# EAGLE board RasPiTimePowerSW_basic (EAGLE 7.7.0)
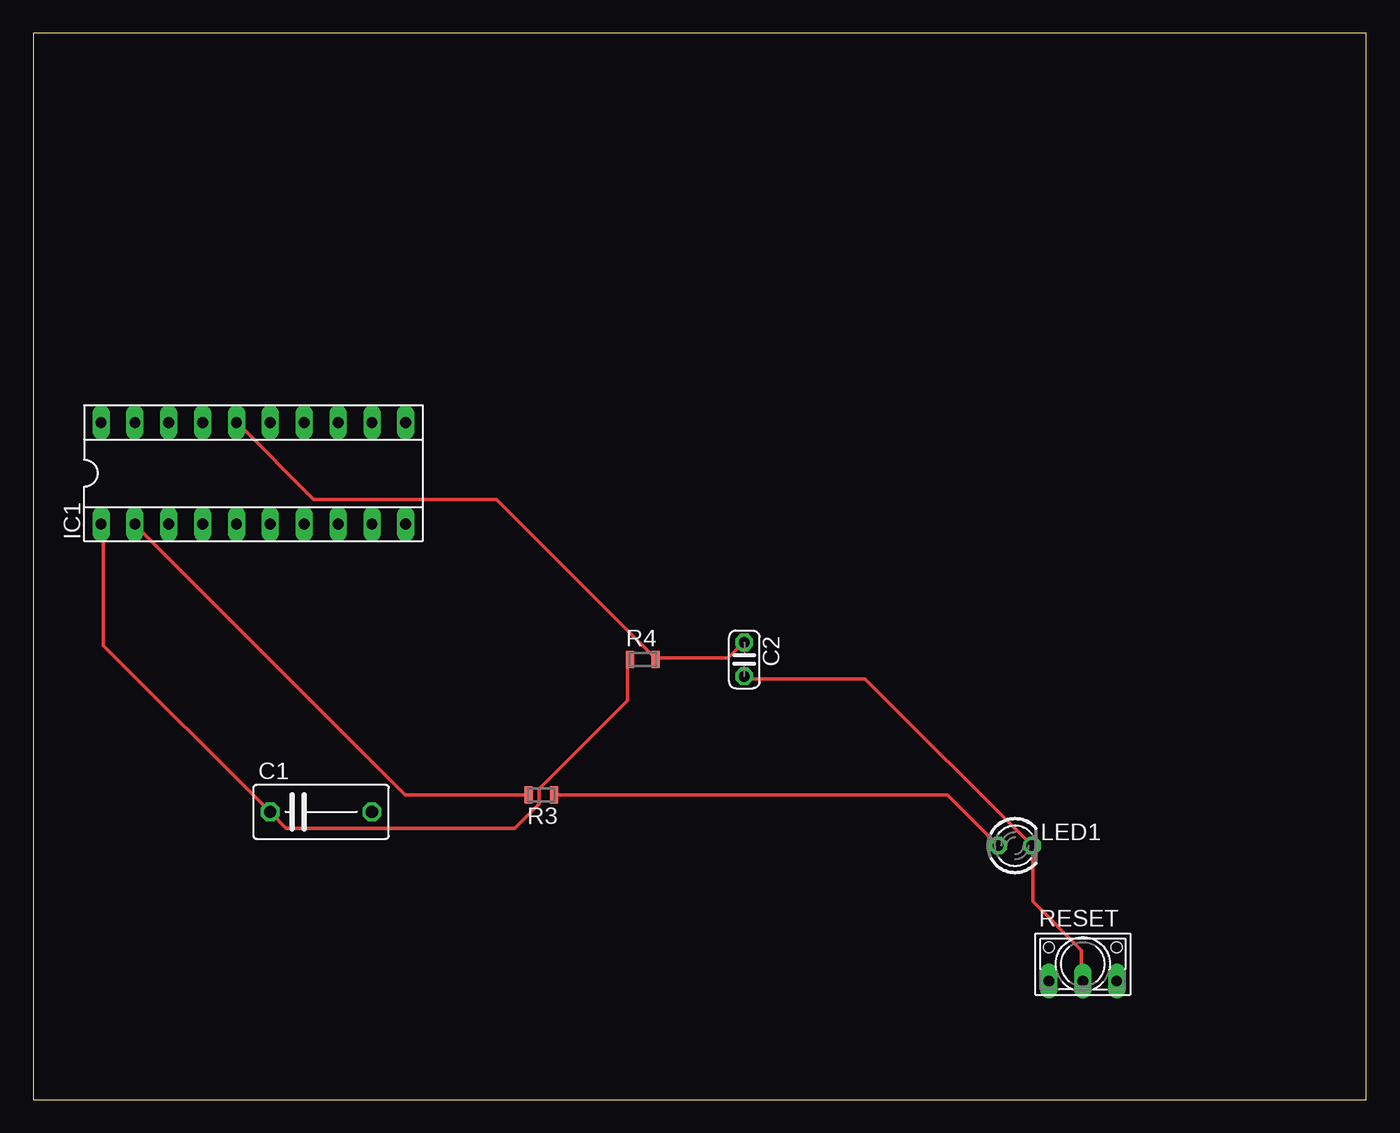
[diagram p0: board, top side]
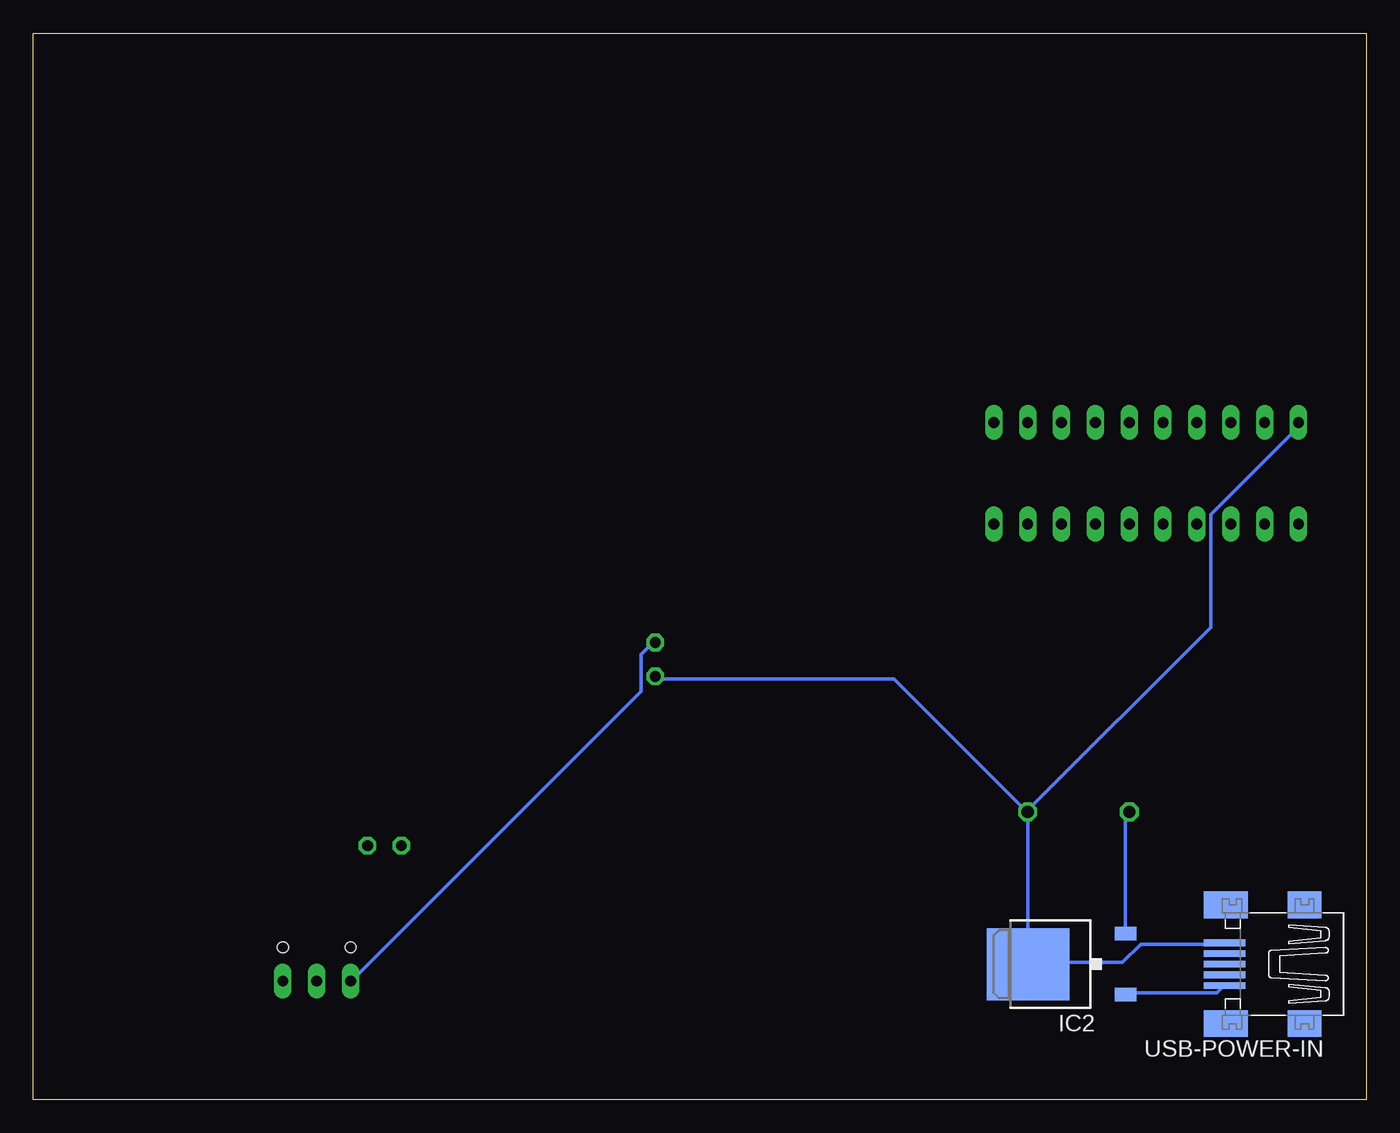
[diagram p1: board, bottom side, seen from below]

Size 100 x 80 mm. Coordinates in mm from the lower left corner, seen from the top.
Outline: 0,0 100,0 100,80 0,80 0,0
Copper layers (1*16): Top 0.035mm / dielectric 1.5mm / Bottom 0.035mm
Design rules "default": minimum track width 10mil, minimum drill 24mil, track to track 8mil, track to pad 8mil, pad to pad 8mil, via to via 8mil, smd to smd 8mil, copper to edge 40mil, drill to drill 8mil, minimum pad ring 10mil, minimum via ring 8mil, stop-mask expansion 4mil, vias tented up to drill 0mil, thermal gap 10mil

## Footprints (pad centres in the part's own frame; a part is rotated, then mirrored left to right if it is on the bottom)
C075-042X103 = drill 0.914 octagon: 1 -3.81,0; 2 3.81,0
C025-024X044 = drill 0.813 octagon: 1 -1.27,0; 2 1.27,0
SOCKET-20 = drill 0.813 long: 1 -11.43,-3.81; 2 -8.89,-3.81; 3 -6.35,-3.81; 4 -3.81,-3.81; 5 -1.27,-3.81; 6 1.27,-3.81; 7 3.81,-3.81; 8 6.35,-3.81; 9 8.89,-3.81; 10 11.43,-3.81; 11 11.43,3.81; 12 8.89,3.81; 13 6.35,3.81; 14 3.81,3.81; 15 1.27,3.81; 16 -1.27,3.81; 17 -3.81,3.81; 18 -6.35,3.81; 19 -8.89,3.81; 20 -11.43,3.81
TO252 = smd 1 x 1.6: 1 -2.28,-4.8; 2 2.28,-4.8 | smd 5.4 x 6.2: 3 0,2.5
LED3MM = drill 0.813 octagon: A -1.27,0; K 1.27,0
MINI_MELF-0102W = smd 0.6 x 1.3: 1 -0.95,0; 2 0.95,0
9450-1 = drill 0.813 long: 1 -2.54,-1.27; 2 0,-1.27; 3 2.54,-1.27 | hole 0.813: 2.54,1.27; -2.54,1.27
32005-400 = smd 3.1 x 0.5: 1 3,1.6; 2 3,0.8; 3 3,0; 4 3,-0.8; 5 3,-1.6 | smd 2.5 x 2: M1 -3,-4.45; M2 -3,4.45 | smd 3.3 x 2: M3 2.9,4.45; M4 2.9,-4.45

## Placement (x,y rotation side)
C1  20μF 16V  [C075-042X103]  21.59,21.59 0 top
C2  1nF(102)  [C025-024X044]  53.34,33.02 270 top
IC1  MSP430G2553  [SOCKET-20]  16.51,46.99 0 top
IC2  NJM2391  [TO252]  22.86,10.16 90 bottom
LED1  TLLG4400  [LED3MM]  73.66,19.05 0 top
R3  [MINI_MELF-0102W]  38.1,22.86 180 top
R4  47kΩ  [MINI_MELF-0102W]  45.72,33.02 0 top
RESET  9450-1  [9450-1]  78.74,10.16 0 top
USB-POWER-IN  USB Micro  [32005-400]  7.62,10.16 180 bottom

## Library data of the parts
C1 C2 R4 = resistor
IC1 = ic-package
IC2 = linear
LED1 = led; MF: VISHAY SEMICONDUCTOR; OC_FARNELL: 1612435
R3 = resistor; R: 200Ω
RESET = switch-misc
USB-POWER-IN = con-cypressindustries; OC_FARNELL: unknown; OC_NEWARK: unknown

## Nets
3.3V: C1.1 IC1.1 IC2.2 R4.1
5VIN: IC2.1 USB-POWER-IN.1
GND: C1.2 C2.2 IC1.20 IC2.3 LED1.K RESET.2 USB-POWER-IN.5
N$2: IC1.13
N$4: IC1.2 R3.2
N$7: LED1.A R3.1
RESET: C2.1 IC1.16 R4.2 RESET.1

## Tracks (layer width: path | path; a pad name or v marks a point on that pad's centre or on a via)
3.3V
  Top 0.254: R4.1 44.58,32.92 44.58,29.95 37.95,23.32 37.95,22.17 36.12,20.34 18.97,20.34 17.83,21.49 C1.1 17.6,21.72 5.26,34.06 5.26,42.98 IC1.1
  Bottom 0.254: IC2.2 18.06,12.57 18.06,21.26 17.83,21.49 C1.1
5VIN
  Bottom 0.254: IC2.1 18.06,8 11.2,8 10.74,8.46 USB-POWER-IN.1
GND
  Top 0.254: RESET.2 78.64,8.91 78.64,11.2 74.98,14.86 74.98,18.97 LED1.K 74.75,19.2 62.41,31.55 53.49,31.55 C2.2
  Bottom 0.254: USB-POWER-IN.5 10.74,11.66 16.92,11.66 18.29,10.29 25.15,10.29 IC2.3 25.38,10.29 25.38,21.49 C1.2 | IC1.20 5.26,50.75 5.26,50.29 11.66,43.89 11.66,35.43 25.38,21.72 C1.2 | C2.2 53.26,31.55 35.43,31.55 25.6,21.72 C1.2
N$4
  Top 0.254: R3.2 27.89,22.86 7.77,42.98 IC1.2
N$7
  Top 0.254: R3.1 68.58,22.86 LED1.A
RESET
  Top 0.254: C2.1 53.26,34.29 52.12,33.15 46.86,33.15 R4.2 46.63,33.15 34.75,45.03 21.03,45.03 15.32,50.75 IC1.16
  Bottom 0.254: RESET.1 76.12,8.91 54.41,30.63 54.41,33.38 53.49,34.29 C2.1